# EAGLE board group-bare (EAGLE 9.5.2)
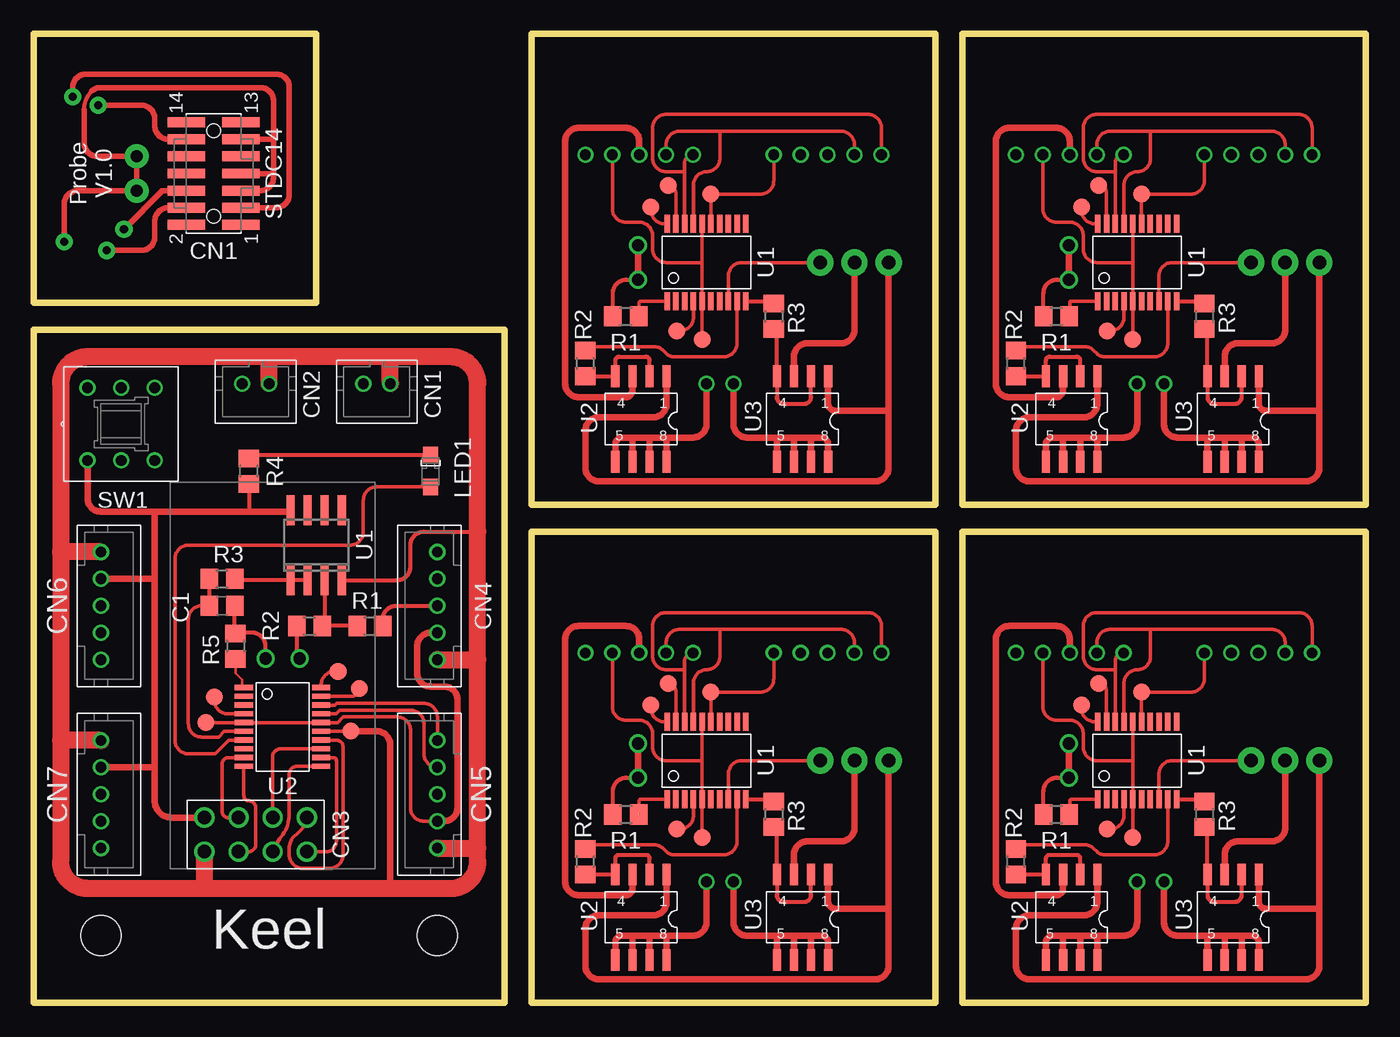
[diagram p0: board, top side]
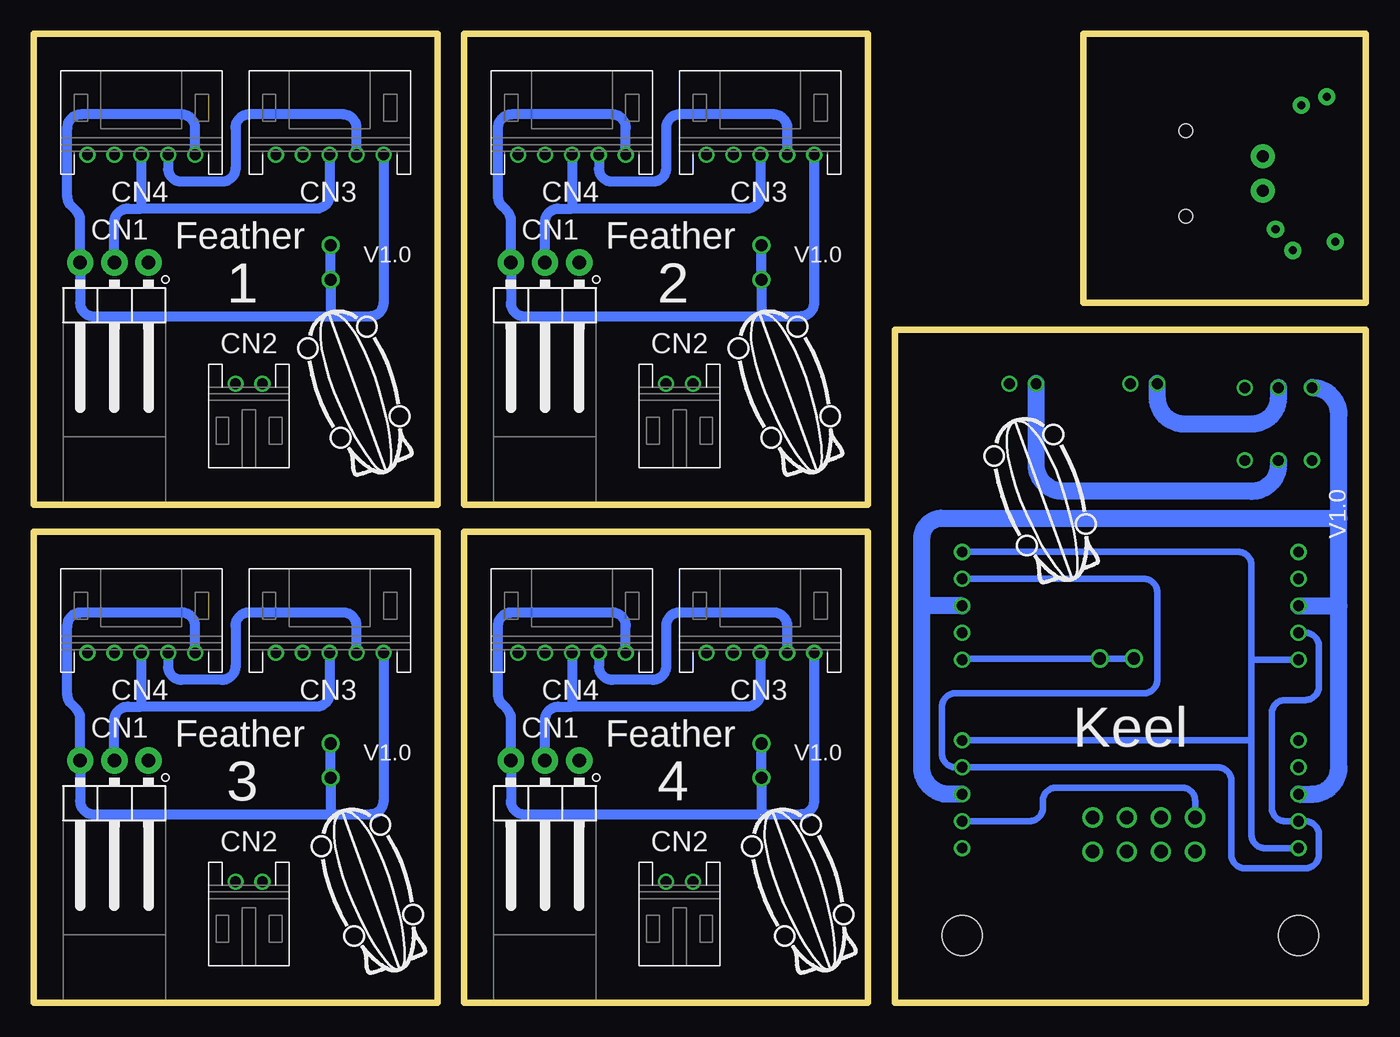
[diagram p1: board, bottom side, seen from below]

Size 99 x 72 mm. Coordinates in mm from the lower left corner, seen from the top.
Outline: 21,72 0,72 0,52 21,52 21,72
Outline: 35,50 35,0 0,0 0,50 35,50
Outline: 99,0 99,35 69,35 69,0 99,0
Outline: 99,37 99,72 69,72 69,37 99,37
Outline: 67,0 67,35 37,35 37,0 67,0
Outline: 67,37 67,72 37,72 37,37 67,37
Copper layers (1*16): Top 0.018mm / dielectric 1.55mm / Bottom 0.018mm
Design rules "eurocircuits *": minimum track width 0.2mm, minimum drill 0.2mm, track to track 0.2mm, track to pad 0.2mm, pad to pad 0.2mm, via to via 0.2mm, smd to smd 0.2mm, copper to edge 40mil, drill to drill 40mil, minimum pad ring 0.2mm, minimum via ring 0.125mm, stop-mask expansion 0.075mm, vias tented up to drill 0.25mm, thermal gap 10mil
Holes 3 mm at 30,5 5,5

## Footprints (pad centres in the part's own frame; a part is rotated, then mirrored left to right if it is on the bottom)
C0805 = smd 1.3 x 1.5: 1 -0.95,0; 2 0.95,0
KEEL_PROBE-IC1 = smd 1.27 x 1.27: CLK 4.128,4.128; DIO 5.715,2.857; GND 5.08,-0.318; NRST -5.08,2.223; VCC -5.715,0.318 | drill 0.9: GND-D1 -1.27,5.08; GND-D2 1.27,5.08
FTSH-107-01-L-DV-K-A = smd 0.737 x 2.794: 01 -3.81,-2.032; 02 -3.81,2.032; 03 -2.54,-2.032; 04 -2.54,2.032; 05 -1.27,-2.032; 06 -1.27,2.032; 07 0,-2.032; 08 0,2.032; 09 1.27,-2.032; 10 1.27,2.032; 11 2.54,-2.032; 12 2.54,2.032; 13 3.81,-2.032; 14 3.81,2.032 | hole 1.016: -3.175,0; 3.175,0
KEEL_PROBE1 = drill 0.6 pad 1.27: CLK 4.128,4.128; DIO 5.715,2.857; GND 5.08,-0.318; NRST -5.08,2.223; VCC -5.715,0.318 | drill 0.9 pad 1.778: GND-D1 -1.27,5.08; GND-D2 1.27,5.08
1X2 = drill 0.8: 1 1,0; 2 -1,0
PIN = drill 1: 1 -3.81,-1.27; 2 -3.81,1.27; 3 -1.27,-1.27; 4 -1.27,1.27; 5 1.27,-1.27; 6 1.27,1.27; 7 3.81,-1.27; 8 3.81,1.27
1X5 = drill 0.8: 1 -4,0; 2 -2,0; 3 0,0; 4 2,0; 5 4,0
1X2H = drill 0.8: 1 1,0; 2 -1,0
1X5H = drill 0.8: 1 4,0; 2 2,0; 3 0,0; 4 -2,0; 5 -4,0
1X03/90 = drill 1 pad 1.95: 1 -2.54,0; 2 0,0; 3 2.54,0
AP2012 = smd 1.25 x 1.1: A -1.175,0; C 1.175,0
R0805 = smd 1.3 x 1.5: 1 -0.95,0; 2 0.95,0
TL2201 = drill 0.8: 1 -2.5,-2.7; 2 0,-2.7; 3 2.5,-2.7; 4 -2.5,2.7; 5 0,2.7; 6 2.5,2.7
SO08 = smd 0.6 x 2.2: 1 -1.905,-2.6; 2 -0.635,-2.6; 3 0.635,-2.6; 4 1.905,-2.6; 5 1.905,2.6; 6 0.635,2.6; 7 -0.635,2.6; 8 -1.905,2.6
SSOP20 = smd 0.4 x 1.35: 1 -2.925,-2.875; 2 -2.275,-2.875; 3 -1.625,-2.875; 4 -0.975,-2.875; 5 -0.325,-2.875; 6 0.325,-2.875; 7 0.975,-2.875; 8 1.625,-2.875; 9 2.275,-2.875; 10 2.925,-2.875; 11 2.925,2.875; 12 2.275,2.875; 13 1.625,2.875; 14 0.975,2.875; 15 0.325,2.875; 16 -0.325,2.875; 17 -0.975,2.875; 18 -1.625,2.875; 19 -2.275,2.875; 20 -2.925,2.875
SO8-2 = smd 0.61 x 1.626: 1 -2.54,-2.54; 2 -1.27,-2.54; 3 0,-2.54; 4 1.27,-2.54; 5 1.27,3.81; 6 0,3.81; 7 -1.27,3.81; 8 -2.54,3.81

## Placement (x,y rotation side)
C1  470pf  [C0805]  14,29.5 180 top
CN0  KEEL_PROBE1IC  [KEEL_PROBE-IC1]  18.5,20.5 0 top
CN1  STDC14  [FTSH-107-01-L-DV-K-A]  13.38,61.61 90 top
CN2  KEEL_PROBE1PROBE  [KEEL_PROBE1]  2.58,61.61 270 top
CN3  BAT0  [1X2]  25.5,46 180 top
CN4  BAT1  [1X2]  16.5,46 180 top
CN5  NRF24013  [PIN]  16.5,12.5 0 top
CN6  F1  [1X5]  30,29.5 90 top
CN7  F2  [1X5]  30,15.5 90 top
CN8  F3  [1X5]  5,29.5 270 top
CN9  F4  [1X5]  5,15.5 270 top
CN10  KEEL_PROBE1IC  [KEEL_PROBE-IC1]  82,18 90 top
CN11  1X2HORIZONTAL  [1X2H]  83,9 180 bottom
CN12  F1  [1X5H]  77,26 0 bottom
CN13  [1X03/90]  93,18 180 bottom
CN14  F1  [1X5H]  91,26 0 bottom
CN15  KEEL_PROBE1IC  [KEEL_PROBE-IC1]  50,18 90 top
CN16  1X2HORIZONTAL  [1X2H]  51,9 180 bottom
CN17  F1  [1X5H]  45,26 0 bottom
CN18  [1X03/90]  61,18 180 bottom
CN19  F1  [1X5H]  59,26 0 bottom
CN20  KEEL_PROBE1IC  [KEEL_PROBE-IC1]  50,55 90 top
CN21  1X2HORIZONTAL  [1X2H]  51,46 180 bottom
CN22  F1  [1X5H]  45,63 0 bottom
CN23  [1X03/90]  61,55 180 bottom
CN24  F1  [1X5H]  59,63 0 bottom
CN25  KEEL_PROBE1IC  [KEEL_PROBE-IC1]  82,55 90 top
CN26  1X2HORIZONTAL  [1X2H]  83,46 180 bottom
CN27  F1  [1X5H]  77,63 0 bottom
CN28  [1X03/90]  93,55 180 bottom
CN29  F1  [1X5H]  91,63 0 bottom
E$1  [ZEPPELIN]  43,45.5 20 bottom
E$2  [ZEPPELIN]  75,45.5 20 bottom
E$3  [ZEPPELIN]  42,8.5 20 bottom
E$4  [ZEPPELIN]  74,8.5 20 bottom
E$5  [ZEPPELIN]  24,37.5 20 bottom
LED1  AP2012  [AP2012]  29.5,39.5 90 top
R1  10k  [R0805]  25,28 0 top
R2  10k  [R0805]  20.5,28 0 top
R3  500r  [R0805]  14,31.5 0 top
R4  300r  [R0805]  16,39.5 90 top
R5  1k  [R0805]  15,26.5 270 top
R6  51k  [R0805]  73,10.5 90 top
R7  51k  [R0805]  87,14 270 top
R8  1k  [R0805]  76,14 0 top
R9  51k  [R0805]  41,10.5 90 top
R10  51k  [R0805]  55,14 270 top
R11  1k  [R0805]  44,14 0 top
R12  51k  [R0805]  41,47.5 90 top
R13  51k  [R0805]  55,51 270 top
R14  1k  [R0805]  44,51 0 top
R15  51k  [R0805]  73,47.5 90 top
R16  51k  [R0805]  87,51 270 top
R17  1k  [R0805]  76,51 0 top
SW1  TL2201  [TL2201]  6.5,43 0 top
U1  LM358D  [SO08]  21,34 0 top
U2  STM32L011  [SSOP20]  18.5,20.5 270 top
U3  IRF7105  [SO8-2]  76.5,7 180 top
U4  IRF7105  [SO8-2]  88.5,7 180 top
U5  STM32L011  [SSOP20]  82,18 0 top
U6  IRF7105  [SO8-2]  44.5,7 180 top
U7  IRF7105  [SO8-2]  56.5,7 180 top
U8  STM32L011  [SSOP20]  50,18 0 top
U9  IRF7105  [SO8-2]  44.5,44 180 top
U10  IRF7105  [SO8-2]  56.5,44 180 top
U11  STM32L011  [SSOP20]  50,55 0 top
U12  IRF7105  [SO8-2]  76.5,44 180 top
U13  IRF7105  [SO8-2]  88.5,44 180 top
U14  STM32L011  [SSOP20]  82,55 0 top

## Library data of the parts
C1 = rcl; SPICEPREFIX: C
CN0 CN2 CN10 CN15 CN20 CN25 = probe
CN1 = con-samtec-FTSH
CN3 CN4 CN6-CN9 CN11 CN12 CN14 CN16 CN17 CN19 CN21 CN22 CN24 CN26 CN27 CN29 = con-pinhead-2mm
CN5 = nrf24
CN13 CN18 CN23 CN28 = con-pinhead
E$1-E$5 = logo
LED1 = led
R1-R17 = rcl; SPICEPREFIX: R
SW1 = switch
U1 = linear
U2 U5 U8 U11 U14 = st
U3 U4 U6 U7 U9 U10 U12 U13 = irf-2

## Nets
+3V1: CN12.3 CN13.2 CN14.3 U3.3 U4.3
+3V2: CN17.3 CN18.2 CN19.3 U6.3 U7.3
+3V3: CN6.3 CN7.3 CN8.3 CN9.3 R1.2 SW1.4
+3V4: CN22.3 CN23.2 CN24.3 U9.3 U10.3
+3V5: CN27.3 CN28.2 CN29.3 U12.3 U13.3
GND: CN1.05 CN1.07 CN1.11 CN2.GND CN2.GND-D1 CN2.GND-D2
GND1: C1.1 CN0.GND CN0.GND-D1 CN0.GND-D2 CN3.2 CN4.2 CN5.1 CN6.1 CN7.1 CN8.1 CN9.1 R2.1 R5.1 U1.4 U2.15
GND2: CN10.GND CN10.GND-D1 CN10.GND-D2 CN12.1 CN13.3 CN14.1 R8.1 U3.1 U4.1 U5.15
GND3: CN15.GND CN15.GND-D1 CN15.GND-D2 CN17.1 CN18.3 CN19.1 R11.1 U6.1 U7.1 U8.15
GND4: CN20.GND CN20.GND-D1 CN20.GND-D2 CN22.1 CN23.3 CN24.1 R14.1 U9.1 U10.1 U11.15
GND5: CN25.GND CN25.GND-D1 CN25.GND-D2 CN27.1 CN28.3 CN29.1 R17.1 U12.1 U13.1 U14.15
I2C_SCL: CN6.4 CN7.4 CN8.4 CN9.4 U2.17
I2C_SCL1: CN12.4 CN14.4 U5.17
I2C_SCL2: CN17.4 CN19.4 U8.17
I2C_SCL3: CN22.4 CN24.4 U11.17
I2C_SCL4: CN27.4 CN29.4 U14.17
I2C_SDA: CN6.5 CN7.5 CN8.5 CN9.5 U2.18
I2C_SDA1: CN12.5 CN14.5 U5.18
I2C_SDA2: CN17.5 CN19.5 U8.18
I2C_SDA3: CN22.5 CN24.5 U11.18
I2C_SDA4: CN27.5 CN29.5 U14.18
N$1: R1.1 R2.2 U1.3
N$2: LED1.C R4.2
N$3: LED1.A U2.7
N$4: C1.2 R3.1 U2.6
N$5: R5.2 U2.1
N$6: R3.2 U1.1 U1.2
N$7: CN4.1 SW1.5
N$8: CN3.1 SW1.2
N$9: CN11.2 U3.5 U3.6 U3.7 U3.8
N$10: CN11.1 U4.5 U4.6 U4.7 U4.8
N$11: R6.1 U3.2 U3.4
N$12: R7.2 U4.2 U4.4
N$13: R8.2 U5.1
N$14: R7.1 U5.10
N$15: R6.2 U5.9
N$16: CN13.1 U5.8
N$17: CN16.2 U6.5 U6.6 U6.7 U6.8
N$18: CN16.1 U7.5 U7.6 U7.7 U7.8
N$19: R9.1 U6.2 U6.4
N$20: R10.2 U7.2 U7.4
N$21: R11.2 U8.1
N$22: R10.1 U8.10
N$23: R9.2 U8.9
N$24: CN18.1 U8.8
N$25: CN21.2 U9.5 U9.6 U9.7 U9.8
N$26: CN21.1 U10.5 U10.6 U10.7 U10.8
N$27: R12.1 U9.2 U9.4
N$28: R13.2 U10.2 U10.4
N$29: R14.2 U11.1
N$30: R13.1 U11.10
N$31: R12.2 U11.9
N$32: CN23.1 U11.8
N$33: CN26.2 U12.5 U12.6 U12.7 U12.8
N$34: CN26.1 U13.5 U13.6 U13.7 U13.8
N$35: R15.1 U12.2 U12.4
N$36: R16.2 U13.2 U13.4
N$37: R17.2 U14.1
N$38: R16.1 U14.10
N$39: R15.2 U14.9
N$40: CN28.1 U14.8
NRST: CN1.12 CN2.NRST
NRST1: CN0.NRST U2.4
NRST2: CN10.NRST U5.4
NRST3: CN15.NRST U8.4
NRST4: CN20.NRST U11.4
NRST5: CN25.NRST U14.4
SPI_CE: CN5.3 U2.10
SPI_CSN: CN5.4 U2.9
SPI_IRQ: CN5.8 U2.14
SPI_MISO: CN5.7 U2.12
SPI_MOSI: CN5.6 U2.13
SPI_SCK: CN5.5 U2.11
SWCLK: CN1.06 CN2.CLK
SWCLK1: CN0.CLK U2.20
SWCLK2: CN10.CLK U5.20
SWCLK3: CN15.CLK U8.20
SWCLK4: CN20.CLK U11.20
SWCLK5: CN25.CLK U14.20
SWDIO: CN1.04 CN2.DIO
SWDIO1: CN0.DIO U2.19
SWDIO2: CN10.DIO U5.19
SWDIO3: CN15.DIO U8.19
SWDIO4: CN20.DIO U11.19
SWDIO5: CN25.DIO U14.19
T_VCC: CN1.03 CN2.VCC
VCC: CN0.VCC CN5.2 CN6.2 CN7.2 CN8.2 CN9.2 R4.1 SW1.1 U1.8 U2.5 U2.16
VCC1: CN10.VCC CN12.2 CN14.2 U5.5 U5.16
VCC2: CN15.VCC CN17.2 CN19.2 U8.5 U8.16
VCC3: CN20.VCC CN22.2 CN24.2 U11.5 U11.16
VCC4: CN25.VCC CN27.2 CN29.2 U14.5 U14.16

## Tracks (layer width: path | path; a pad name or v marks a point on that pad's centre or on a via)
+3V1
  Top 0.5: U3.3 76.5,8.5 arc-90 76,8 72.5,8 arc-90 71.5,9 71.5,27 arc-90 72.5,28 76,28 arc-90 77,27 CN12.3 | U4.3 88.5,11 arc-90 89.5,12 92,12 arc90 93,13 CN13.2
  Bottom 0.75: 91,22 92,22 arc-90 93,21 CN13.2 | CN14.3 91,22 | CN12.3 77,23 arc90 78,22 91,22
+3V2
  Top 0.5: U6.3 44.5,8.5 arc-90 44,8 40.5,8 arc-90 39.5,9 39.5,27 arc-90 40.5,28 44,28 arc-90 45,27 CN17.3 | U7.3 56.5,11 arc-90 57.5,12 60,12 arc90 61,13 CN18.2
  Bottom 0.75: 59,22 60,22 arc-90 61,21 CN18.2 | CN19.3 59,22 | CN17.3 45,23 arc90 46,22 59,22
+3V3
  Top 0.3: R1.2 25.95,28.5 arc-90 26.95,29.5 CN6.3
  Bottom 1.25: CN7.3 31,15.5 arc90 33,17.5 33,29.5 | 33,29.5 33,34.5 arc90 31.5,36 2,36 | CN6.3 33,29.5 | CN9.3 4,15.5 arc-90 2,17.5 2,29.5 | SW1.4 arc90 2,43.7 2,36 | 2,29.5 2,36 | CN8.3 2,29.5
+3V4
  Top 0.5: U9.3 44.5,45.5 arc-90 44,45 40.5,45 arc-90 39.5,46 39.5,64 arc-90 40.5,65 44,65 arc-90 45,64 CN22.3 | U10.3 56.5,48 arc-90 57.5,49 60,49 arc90 61,50 CN23.2
  Bottom 0.75: 59,59 60,59 arc-90 61,58 CN23.2 | CN24.3 59,59 | CN22.3 45,60 arc90 46,59 59,59
+3V5
  Top 0.5: U12.3 76.5,45.5 arc-90 76,45 72.5,45 arc-90 71.5,46 71.5,64 arc-90 72.5,65 76,65 arc-90 77,64 CN27.3 | U13.3 88.5,48 arc-90 89.5,49 92,49 arc90 93,50 CN28.2
  Bottom 0.75: 91,59 92,59 arc-90 93,58 CN28.2 | CN29.3 91,59 | CN27.3 77,60 arc90 78,59 91,59
GND
  Top 0.3: 3.75,66.34 arc-45 4.33,67.74
  Top 0.4: 17.82,64.15 17.82,61.61 | CN1.07 17.82,61.61 | CN1.11 17.82,64.15 | CN1.05 16.82,60.34 arc90 17.82,61.34 17.82,61.61 | 17.82,64.15 17.82,67 arc90 16.82,68 4.96,68 arc45 4.33,67.74 | 3.75,66.34 3.75,63.88 arc90 4.75,62.88 CN2.GND-D1 CN2.GND-D2 3.27,60.34 arc90 2.27,59.34 CN2.GND
GND1
  Top 0.25: U2.15 CN0.GND
  Top 0.3: R2.1 19.55,25.8 CN0.GND-D2 | 14.95,27.5 R5.1 arc-90 14.95,27.5 | U1.4 27,31.4 arc90 28,32.4 28,34 arc-90 29,35 33,35 | CN0.GND-D1 17.23,26.5 arc90 16.23,27.5 14.95,27.5 | 14.95,27.5 C1.1
  Top 0.5: CN0.GND 25.5,20.18 arc-90 26.5,19.18 26.5,8.5
  Top 1.25: 2,33.5 2,46 arc-90 4,48 17.5,48 | 2,33.5 2,19.5 | 2,19.5 2,10.5 arc90 4,8.5 12.5,8.5 | 12.5,8.5 26.5,8.5 31,8.5 arc90 33,10.5 33,11.5 | 33,11.5 33,25.5 | 33,25.5 33,35 33,46 arc90 31,48 26.5,48 | 26.5,48 17.5,48 | CN4.2 17.5,48 | CN3.2 26.5,48 | CN9.1 2,19.5 | CN5.1 12.69,8.69 arc-90 12.5,8.5 | CN6.1 33,25.5 | CN7.1 33,11.5 | CN8.1 2,33.5
  Bottom 0.5: CN0.GND-D1 CN0.GND-D2 30,25.58 CN6.1
GND2
  Top 0.25: U5.15 CN10.GND arc90 CN10.GND 86,23.08 arc90 87,24.08 CN14.1
  Top 0.3: R8.1 75.05,15.73 arc-90 76.05,16.73 CN10.GND-D1
  Top 0.5: U3.1 79.04,7.5 arc-90 78.04,6.5 74,6.5 arc90 73,5.5 73,2.75 arc90 74,1.75 94.54,1.75 arc90 95.54,2.75 95.54,7 | CN10.GND-D1 CN10.GND-D2 | 95.54,7 CN13.3 | U4.1 91.04,7.5 arc90 91.54,7 95.54,7
  Bottom 0.75: CN14.1 87,28 arc-90 88,29 95.5,29 arc-90 96.5,28 96.5,22.91 arc-45 96.21,22.21 95.83,21.83 arc45 95.54,21.13 CN13.3 95.54,15 arc-90 94.54,14 77,14 | 77,14 74,14 arc-90 73,15 CN12.1 | CN10.GND-D2 CN10.GND-D1 76.92,14.08 arc90 77,14
GND3
  Top 0.25: U8.15 CN15.GND arc90 CN15.GND 54,23.08 arc90 55,24.08 CN19.1
  Top 0.3: R11.1 43.05,15.73 arc-90 44.05,16.73 CN15.GND-D1
  Top 0.5: U6.1 47.04,7.5 arc-90 46.04,6.5 42,6.5 arc90 41,5.5 41,2.75 arc90 42,1.75 62.54,1.75 arc90 63.54,2.75 63.54,7 | CN15.GND-D1 CN15.GND-D2 | 63.54,7 CN18.3 | U7.1 59.04,7.5 arc90 59.54,7 63.54,7
  Bottom 0.75: CN19.1 55,28 arc-90 56,29 63.5,29 arc-90 64.5,28 64.5,22.91 arc-45 64.21,22.21 63.83,21.83 arc45 63.54,21.13 CN18.3 63.54,15 arc-90 62.54,14 45,14 | 45,14 42,14 arc-90 41,15 CN17.1 | CN15.GND-D2 CN15.GND-D1 44.92,14.08 arc90 45,14
GND4
  Top 0.25: U11.15 CN20.GND arc90 CN20.GND 54,60.08 arc90 55,61.08 CN24.1
  Top 0.3: R14.1 43.05,52.73 arc-90 44.05,53.73 CN20.GND-D1
  Top 0.5: U9.1 47.04,44.5 arc-90 46.04,43.5 42,43.5 arc90 41,42.5 41,39.75 arc90 42,38.75 62.54,38.75 arc90 63.54,39.75 63.54,44 | CN20.GND-D1 CN20.GND-D2 | 63.54,44 CN23.3 | U10.1 59.04,44.5 arc90 59.54,44 63.54,44
  Bottom 0.75: CN24.1 55,65 arc-90 56,66 63.5,66 arc-90 64.5,65 64.5,59.91 arc-45 64.21,59.21 63.83,58.83 arc45 63.54,58.13 CN23.3 63.54,52 arc-90 62.54,51 45,51 | 45,51 42,51 arc-90 41,52 CN22.1 | CN20.GND-D2 CN20.GND-D1 44.92,51.08 arc90 45,51
GND5
  Top 0.25: U14.15 CN25.GND arc90 CN25.GND 86,60.08 arc90 87,61.08 CN29.1
  Top 0.3: R17.1 75.05,52.73 arc-90 76.05,53.73 CN25.GND-D1
  Top 0.5: U12.1 79.04,44.5 arc-90 78.04,43.5 74,43.5 arc90 73,42.5 73,39.75 arc90 74,38.75 94.54,38.75 arc90 95.54,39.75 95.54,44 | CN25.GND-D1 CN25.GND-D2 | 95.54,44 CN28.3 | U13.1 91.04,44.5 arc90 91.54,44 95.54,44
  Bottom 0.75: CN29.1 87,65 arc-90 88,66 95.5,66 arc-90 96.5,65 96.5,59.91 arc-45 96.21,59.21 95.83,58.83 arc45 95.54,58.13 CN28.3 95.54,52 arc-90 94.54,51 77,51 | 77,51 74,51 arc-90 73,52 CN27.1 | CN25.GND-D2 CN25.GND-D1 76.92,51.08 arc90 77,51
I2C_SCL
  Top 0.25: CN7.4 arc-90 29,18.5 29,20.75 arc90 28,21.75 22.75,21.75 22.48,21.48 U2.17
  Bottom 0.5: CN6.4 16.5,31.5 arc90 15.5,30.5 15.5,24 arc90 16.5,23 30.5,23 arc-90 31.5,22 31.5,18.5 arc-90 30.5,17.5 CN7.4 11,17.5 arc90 10,16.5 10,11 arc-90 9,10 4.5,10 arc-90 3.5,11 3.5,12.5 arc-90 4.5,13.5 CN9.4 6,13.5 arc90 7,14.5 7,21.5 arc90 6,22.5 4.5,22.5 arc-90 3.5,23.5 3.5,26.5 arc-90 4.5,27.5 CN8.4
I2C_SCL1
  Top 0.25: U5.17 81.03,23.75 arc-90 82.03,24.75 arc90 83,25.73 83,27.75 | CN12.4 79,26.75 arc-90 80,27.75 83,27.75 | CN14.4 93,26.75 arc90 92,27.75 83,27.75
I2C_SCL2
  Top 0.25: U8.17 49.02,23.75 arc-90 50.02,24.75 arc90 51,25.73 51,27.75 | CN17.4 47,26.75 arc-90 48,27.75 51,27.75 | CN19.4 61,26.75 arc90 60,27.75 51,27.75
I2C_SCL3
  Top 0.25: U11.17 49.02,60.75 arc-90 50.02,61.75 arc90 51,62.73 51,64.75 | CN22.4 47,63.75 arc-90 48,64.75 51,64.75 | CN24.4 61,63.75 arc90 60,64.75 51,64.75
I2C_SCL4
  Top 0.25: U14.17 81.03,60.75 arc-90 82.03,61.75 arc90 83,62.73 83,64.75 | CN27.4 79,63.75 arc-90 80,64.75 83,64.75 | CN29.4 93,63.75 arc90 92,64.75 83,64.75
I2C_SDA
  Top 0.25: CN7.5 30,21.25 arc90 29,22.25 22.5,22.25 22.38,22.12 U2.18
  Bottom 0.5: CN9.5 7.5,11.5 arc90 8.5,12.5 8.5,19.5 | CN7.5 8.5,19.5 | CN6.5 9.5,33.5 arc90 8.5,32.5 8.5,25.5 | 8.5,25.5 8.5,19.5 | CN8.5 8.5,25.5
I2C_SDA1
  Top 0.25: U5.18 80.38,24.75 | 80.38,24.75 80.38,25.38 arc-90 CN12.5 | CN14.5 95,28 arc90 94,29 79,29 arc90 78,28 78,25.75 arc90 79,24.75 80.38,24.75
I2C_SDA2
  Top 0.25: U8.18 48.38,24.75 | 48.38,24.75 48.38,25.38 arc-90 CN17.5 | CN19.5 63,28 arc90 62,29 47,29 arc90 46,28 46,25.75 arc90 47,24.75 48.38,24.75
I2C_SDA3
  Top 0.25: U11.18 48.38,61.75 | 48.38,61.75 48.38,62.38 arc-90 CN22.5 | CN24.5 63,65 arc90 62,66 47,66 arc90 46,65 46,62.75 arc90 47,61.75 48.38,61.75
I2C_SDA4
  Top 0.25: U14.18 80.38,61.75 | 80.38,61.75 80.38,62.38 arc-90 CN27.5 | CN29.5 95,65 arc90 94,66 79,66 arc90 78,65 78,62.75 arc90 79,61.75 80.38,61.75
N$1
  Top 0.3: R1.1 22,28 | 22,28 R2.2 | U1.3 21.64,28.36 22,28
N$2
  Top 0.3: LED1.C 16.23,40.67 arc90 R4.2
N$3
  Top 0.25: U2.7 15.6,19.5 14.5,19.5 13.5,18.5 11.5,18.5 arc-90 10.5,19.5 10.5,33 arc-90 11.5,34 23.5,34 arc90 24.5,35 24.5,37.33 arc-90 25.5,38.33 LED1.A
N$4
  Top 0.25: C1.2 12.5,29.5 arc90 11.5,28.5 11.5,20.75 arc90 12.5,19.75 13.75,19.75 14.18,20.18 U2.6
  Top 0.3: R3.1 C1.2
N$5
  Top 0.2: U2.1 15.5,23.55 15.5,24 15,24.5 15,25.5
  Top 0.3: 15,25.5 R5.2
N$6
  Top 0.3: U1.2 U1.1 15.05,31.4 arc-90 R3.2
N$7
  Bottom 1.25: SW1.5 6.5,45 arc90 8.5,43 13.5,43 arc90 15.5,45 CN4.1
N$8
  Bottom 1.25: SW1.2 6.5,40 arc90 8.5,38 22.5,38 arc90 24.5,40 CN3.1
N$9
  Top 0.5: CN11.2 82,6 arc-90 81,5 79.04,5 | 79.04,5 77.77,5 | 77.77,5 76.5,5 | U3.8 79.04,5 | U3.7 77.77,5 | U3.6 76.5,5 | U3.5 75.23,4.5 arc-90 75.73,5 76.5,5
N$10
  Top 0.5: CN11.1 84,6 arc90 85,5 87.23,5 | 87.23,5 88.5,5 | U4.7 89.77,5 | 89.77,5 88.5,5 | U4.6 88.5,5 | U4.5 87.23,5 | U4.8 91.04,4.5 arc90 90.54,5 89.77,5
N$11
  Top 0.3: U3.2 77.77,10.73 arc90 77.5,11 75.5,11 arc90 75.23,10.73 U3.4 arc90 U3.4 R6.1
N$12
  Top 0.3: R7.2 arc-90 87.23,12.82 U4.4 87.23,8 arc90 87.73,7.5 89.27,7.5 arc90 89.77,8 U4.2
N$13
  Top 0.25: R8.2 76.97,14.02 arc90 77,14.05 77,15 arc-90 77.12,15.12 U5.1
N$14
  Top 0.3: U5.10 86.83,15.12 arc-90 R7.1
N$15
  Top 0.25: 73.3,11.75 arc90 R6.2 arc-90 73.3,11.75 | U5.9 84.28,12 arc-90 83.28,11 79.6,11 arc-45 79,11.25 78.79,11.46 arc45 78.09,11.75 73.3,11.75
N$16
  Top 0.25: CN13.1 84.62,18 arc90 83.62,17 U5.8
N$17
  Top 0.5: CN16.2 50,6 arc-90 49,5 47.04,5 | 47.04,5 45.77,5 | 45.77,5 44.5,5 | U6.8 47.04,5 | U6.7 45.77,5 | U6.6 44.5,5 | U6.5 43.23,4.5 arc-90 43.73,5 44.5,5
N$18
  Top 0.5: CN16.1 52,6 arc90 53,5 55.23,5 | 55.23,5 56.5,5 | U7.7 57.77,5 | 57.77,5 56.5,5 | U7.6 56.5,5 | U7.5 55.23,5 | U7.8 59.04,4.5 arc90 58.54,5 57.77,5
N$19
  Top 0.3: U6.2 45.77,10.73 arc90 45.5,11 43.5,11 arc90 43.23,10.73 U6.4 arc90 U6.4 R9.1
N$20
  Top 0.3: R10.2 arc-90 55.23,12.82 U7.4 55.23,8 arc90 55.73,7.5 57.27,7.5 arc90 57.77,8 U7.2
N$21  (1 unrouted)
  Top 0.25: U8.1 45.12,15.12 arc90 45,15 45,14.05 arc-90 44.97,14.02
N$22
  Top 0.3: U8.10 54.83,15.12 arc-90 R10.1
N$23
  Top 0.25: 41.3,11.75 arc90 R9.2 arc-90 41.3,11.75 | U8.9 52.27,12 arc-90 51.27,11 47.6,11 arc-45 47,11.25 46.79,11.46 arc45 46.09,11.75 41.3,11.75
N$24
  Top 0.25: CN18.1 52.62,18 arc90 51.62,17 U8.8
N$25
  Top 0.5: CN21.2 50,43 arc-90 49,42 47.04,42 | 47.04,42 45.77,42 | 45.77,42 44.5,42 | U9.8 47.04,42 | U9.7 45.77,42 | U9.6 44.5,42 | U9.5 43.23,41.5 arc-90 43.73,42 44.5,42
N$26
  Top 0.5: CN21.1 52,43 arc90 53,42 55.23,42 | 55.23,42 56.5,42 | U10.7 57.77,42 | 57.77,42 56.5,42 | U10.6 56.5,42 | U10.5 55.23,42 | U10.8 59.04,41.5 arc90 58.54,42 57.77,42
N$27
  Top 0.3: U9.2 45.77,47.73 arc90 45.5,48 43.5,48 arc90 43.23,47.73 U9.4 arc90 U9.4 R12.1
N$28
  Top 0.3: R13.2 arc-90 55.23,49.82 U10.4 55.23,45 arc90 55.73,44.5 57.27,44.5 arc90 57.77,45 U10.2
N$29
  Top 0.25: R14.2 44.97,51.02 arc90 45,51.05 45,52 arc-90 45.12,52.12 U11.1
N$30
  Top 0.3: U11.10 54.83,52.12 arc-90 R13.1
N$31
  Top 0.25: 41.3,48.75 arc90 R12.2 arc-90 41.3,48.75 | U11.9 52.27,49 arc-90 51.27,48 47.6,48 arc-45 47,48.25 46.79,48.46 arc45 46.09,48.75 41.3,48.75
N$32
  Top 0.25: CN23.1 52.62,55 arc90 51.62,54 U11.8
N$33
  Top 0.5: CN26.2 82,43 arc-90 81,42 79.04,42 | 79.04,42 77.77,42 | 77.77,42 76.5,42 | U12.8 79.04,42 | U12.7 77.77,42 | U12.6 76.5,42 | U12.5 75.23,41.5 arc-90 75.73,42 76.5,42
N$34
  Top 0.5: CN26.1 84,43 arc90 85,42 87.23,42 | 87.23,42 88.5,42 | U13.7 89.77,42 | 89.77,42 88.5,42 | U13.6 88.5,42 | U13.5 87.23,42 | U13.8 91.04,41.5 arc90 90.54,42 89.77,42
N$35
  Top 0.3: U12.2 77.77,47.73 arc90 77.5,48 75.5,48 arc90 75.23,47.73 U12.4 arc90 U12.4 R15.1
N$36
  Top 0.3: R16.2 arc-90 87.23,49.82 U13.4 87.23,45 arc90 87.73,44.5 89.27,44.5 arc90 89.77,45 U13.2
N$37
  Top 0.25: R17.2 76.97,51.02 arc90 77,51.05 77,52 arc-90 77.12,52.12 U14.1
N$38
  Top 0.3: U14.10 86.83,52.12 arc-90 R16.1
N$39
  Top 0.25: 73.3,48.75 arc90 R15.2 arc-90 73.3,48.75 | U14.9 84.28,49 arc-90 83.28,48 79.6,48 arc-45 79,48.25 78.79,48.46 arc45 78.09,48.75 73.3,48.75
N$40
  Top 0.25: CN28.1 84.62,55 arc90 83.62,54 U14.8
NRST
  Top 0.4: CN2.NRST 8,66.69 arc-90 9,65.69 9,65.15 arc90 10,64.15 CN1.12
NRST1
  Top 0.25: U2.4 14.42,21.48 arc-90 13.42,22.48 CN0.NRST
NRST2
  Top 0.25: CN10.NRST 80.03,12.92 arc90 81.03,13.92 U5.4
NRST3
  Top 0.25: CN15.NRST 48.02,12.92 arc90 49.02,13.92 U8.4
NRST4
  Top 0.25: CN20.NRST 48.02,49.92 arc90 49.02,50.92 U11.4
NRST5
  Top 0.25: CN25.NRST 80.03,49.92 arc90 81.03,50.92 U14.4
SPI_CE
  Top 0.254: CN5.3 15.98,11.23 arc90 16.5,11.75 16.5,14.5 arc90 16,15 arc-90 15.62,15.38 U2.10
SPI_CSN
  Top 0.254: U2.9 14.47,18.23 arc90 14,17.75 14,14.25 arc90 14.5,13.75 15.21,13.75 arc90 CN5.4
SPI_IRQ
  Top 0.254: U2.14 22.48,19.52 arc-90 23,19 23,11 arc-90 22,10 20,10 arc-90 19,11 19,11.5 arc-53 19.5,12.5 arc41 CN5.8
SPI_MISO
  Top 0.254: CN5.7 21.73,11.23 arc90 22.5,12 22.5,18 arc90 22.27,18.23 U2.12
SPI_MOSI
  Top 0.254: U2.13 18.38,18.88 arc90 17.75,18.25 17.75,13.79 arc90 CN5.6
SPI_SCK
  Top 0.254: U2.11 19.57,17.57 arc90 19,17 19,14 arc-37 18.5,12.5 arc14 CN5.5
SWCLK
  Top 0.4: CN1.06 9.57,60.34 CN2.CLK
SWCLK1
  Top 0.25: CN0.CLK 22.38,24.63 arc90 21.38,23.63 U2.20
SWCLK2
  Top 0.25: U5.20 78.87,20.88 arc-90 77.87,21.88 CN10.CLK
SWCLK3
  Top 0.25: U8.20 46.87,20.88 arc-90 45.87,21.88 CN15.CLK
SWCLK4
  Top 0.25: U11.20 46.87,57.88 arc-90 45.87,58.88 CN20.CLK
SWCLK5
  Top 0.25: U14.20 78.87,57.88 arc-90 77.87,58.88 CN25.CLK
SWDIO
  Top 0.4: CN1.04 10,59.07 arc90 9,58.07 9,56.9 arc-90 8,55.9 CN2.DIO
SWDIO1
  Top 0.25: U2.19 23.63,22.77 arc90 CN0.DIO
SWDIO2
  Top 0.25: U5.19 79.72,23.13 arc90 CN10.DIO
SWDIO3
  Top 0.25: U8.19 47.73,23.13 arc90 CN15.DIO
SWDIO4
  Top 0.25: U11.19 47.73,60.13 arc90 CN20.DIO
SWDIO5
  Top 0.25: U14.19 79.72,60.13 arc90 CN25.DIO
T_VCC
  Top 0.4: CN2.VCC 2.9,68 arc-90 3.9,69 18,69 arc-90 19,68 19,60.07 arc-90 18,59.07 CN1.03
VCC
  Top 0.25: CN7.2 29,13.5 arc-90 28,14.5 28,20.25 arc90 27,21.25 23,21.25 22.57,20.82 U2.16 U2.5 CN0.VCC
  Top 0.3: R4.1 16,36.5
  Top 0.5: CN5.2 10.23,13.77 arc-90 9,15 9,17.5 | SW1.1 4,37.5 arc90 5,36.5 9,36.5 | 9,36.5 16,36.5 19,36.5 arc90 U1.8 | 9,17.5 9,31.5 | 9,31.5 9,36.5 | CN8.2 9,31.5 | CN9.2 9,17.5 | CN7.2 30.5,13.5 arc90 31.5,14.5 31.5,22.5 arc90 30.5,23.5 29.5,23.5 arc-90 28.5,24.5 28.5,26.5 arc-90 29.5,27.5 CN6.2
  Bottom 0.5: CN5.2 12.69,15 arc-90 13.69,16 23,16 arc-90 24,15 24,14.5 arc90 25,13.5 CN7.2
VCC1
  Top 0.25: CN10.VCC 81.68,15.12 arc90 U5.5 81.67,18 | U5.16 81.67,18 | CN12.2 75,22 arc90 76,21 77,21 arc-90 78,20 78,19 arc90 79,18 81.67,18
  Bottom 0.75: CN14.2 89,25 arc-90 88,24 85,24 arc-90 84,25 84,28 arc90 83,29 76,29 arc90 75,28 CN12.2
VCC2
  Top 0.25: CN15.VCC 49.68,15.12 arc90 U8.5 49.67,18 | U8.16 49.67,18 | CN17.2 43,22 arc90 44,21 45,21 arc-90 46,20 46,19 arc90 47,18 49.67,18
  Bottom 0.75: CN19.2 57,25 arc-90 56,24 53,24 arc-90 52,25 52,28 arc90 51,29 44,29 arc90 43,28 CN17.2
VCC3
  Top 0.25: CN20.VCC 49.68,52.12 arc90 U11.5 49.67,55 | U11.16 49.67,55 | CN22.2 43,59 arc90 44,58 45,58 arc-90 46,57 46,56 arc90 47,55 49.67,55
  Bottom 0.75: CN24.2 57,62 arc-90 56,61 53,61 arc-90 52,62 52,65 arc90 51,66 44,66 arc90 43,65 CN22.2
VCC4
  Top 0.25: CN25.VCC 81.68,52.12 arc90 U14.5 81.67,55 | U14.16 81.67,55 | CN27.2 75,59 arc90 76,58 77,58 arc-90 78,57 78,56 arc90 79,55 81.67,55
  Bottom 0.75: CN29.2 89,62 arc-90 88,61 85,61 arc-90 84,62 84,65 arc90 83,66 76,66 arc90 75,65 CN27.2

## Text on the board
tNames: Probe / V1.0 | CN1 | U1 | U1 | R3 | R3 | R1 | R1 | R2 | R2 | CN2 | CN1 | U3 | U3 | U2 | U2 | R4 | SW1 | LED1 | U1 | R3 | C1 | CN4 | CN6 | R1 | R5 | R2 | U1 | U1 | CN7 | U2 | CN5 | R3 | R3 | CN3 | R1 | R1 | R2 | R2 | U3 | U3 | Keel | U2 | U2
bNames: CN3 | CN4 | CN3 | CN4 | CN1 | CN1 | Feather | Feather | V1.0 | V1.0 | 2 | 1 | CN2 | CN2 | V1.0 | CN3 | CN4 | CN3 | CN4 | Keel | CN1 | CN1 | Feather | Feather | V1.0 | V1.0 | 4 | 3 | CN2 | CN2